# EAGLE board CT_schematic (EAGLE 7.6.0)

Size 100 x 80 mm. Coordinates in mm from the lower left corner, seen from the top.
Outline: 0,0 100,0 100,80 0,80 0,0
Copper layers (1*16): Top 0.035mm / dielectric 1.5mm / Bottom 0.035mm
Design rules "default": minimum track width 10mil, minimum drill 24mil, track to track 8mil, track to pad 8mil, pad to pad 8mil, via to via 8mil, smd to smd 8mil, copper to edge 40mil, drill to drill 8mil, minimum pad ring 10mil, minimum via ring 8mil, stop-mask expansion 4mil, vias tented up to drill 0mil, thermal gap 10mil

## Footprints (pad centres in the part's own frame; a part is rotated, then mirrored left to right if it is on the bottom)
C0603 = smd 0.8 x 0.8: 1 -0.762,0; 2 0.762,0
C0402 = smd 0.5 x 0.5: 1 -0.508,0; 2 0.508,0
C0805 = smd 1.2 x 1.3: 1 -1.016,0; 2 1.016,0
C1210 = smd 1.2 x 2.5: 1 -1.524,0; 2 1.524,0
EXV-9H = smd 3.505 x 1.676: 1 -2.857,0; 2 2.857,0
L0603 = smd 0.8 x 0.8: 1 -0.762,0; 2 0.762,0
DR1040 = smd 1.6 x 3.2: 1 -4.458,0; 2 4.458,0
L0806 = smd 1.016 x 1.524: 1 -0.889,0; 2 0.889,0
PJ-037B_PACKAGE = drill 3.7 square: 1 12,0 | drill 3.2 square: 2 6,0
R0603 = smd 0.8 x 0.8: 1 -0.762,0; 2 0.762,0
LQFP64 = smd 0.3 x 1.2: 1 -3.75,-5.75; 2 -3.25,-5.75; 3 -2.75,-5.75; 4 -2.25,-5.75; 5 -1.75,-5.75; 6 -1.25,-5.75; 7 -0.75,-5.75; 8 -0.25,-5.75; 9 0.25,-5.75; 10 0.75,-5.75; 11 1.25,-5.75; 12 1.75,-5.75; 13 2.25,-5.75; 14 2.75,-5.75; 15 3.25,-5.75; 16 3.75,-5.75; 33 3.75,5.75; 34 3.25,5.75; 35 2.75,5.75; 36 2.25,5.75; 37 1.75,5.75; 38 1.25,5.75; 39 0.75,5.75; 40 0.25,5.75; 41 -0.25,5.75; 42 -0.75,5.75; 43 -1.25,5.75; 44 -1.75,5.75; 45 -2.25,5.75; 46 -2.75,5.75; 47 -3.25,5.75; 48 -3.75,5.75 | smd 1.2 x 0.3: 17 5.75,-3.75; 18 5.75,-3.25; 19 5.75,-2.75; 20 5.75,-2.25; 21 5.75,-1.75; 22 5.75,-1.25; 23 5.75,-0.75; 24 5.75,-0.25; 25 5.75,0.25; 26 5.75,0.75; 27 5.75,1.25; 28 5.75,1.75; 29 5.75,2.25; 30 5.75,2.75; 31 5.75,3.25; 32 5.75,3.75; 49 -5.75,3.75; 50 -5.75,3.25; 51 -5.75,2.75; 52 -5.75,2.25; 53 -5.75,1.75; 54 -5.75,1.25; 55 -5.75,0.75; 56 -5.75,0.25; 57 -5.75,-0.25; 58 -5.75,-0.75; 59 -5.75,-1.25; 60 -5.75,-1.75; 61 -5.75,-2.25; 62 -5.75,-2.75; 63 -5.75,-3.25; 64 -5.75,-3.75
TDFN-8/6MM = smd 0.3 x 0.75: 1 0,0; 2 0.5,0; 3 1,0; 4 1.5,0; 5 1.5,3; 6 1,3; 7 0.5,3; 8 0,3
SMD-8 = smd 0.72 x 0.6: 1 -1.45,-0.7; 2 -0.485,-0.7; 3 0.485,-0.7; 4 1.455,-0.7; 5 1.455,0.7; 6 0.485,0.7; 7 -0.485,0.7; 8 -1.455,0.7
RHB32_3P45X3P45 = smd 0.85 x 0.28: 1 -2.475,1.75; 2 -2.475,1.25; 3 -2.475,0.75; 4 -2.475,0.25; 5 -2.475,-0.25; 6 -2.475,-0.75; 7 -2.475,-1.25; 8 -2.475,-1.75; 17 2.475,-1.75; 18 2.475,-1.25; 19 2.475,-0.75; 20 2.475,-0.25; 21 2.475,0.25; 22 2.475,0.75; 23 2.475,1.25; 24 2.475,1.75 | smd 0.28 x 0.85: 9 -1.75,-2.475; 10 -1.25,-2.475; 11 -0.75,-2.475; 12 -0.25,-2.475; 13 0.25,-2.475; 14 0.75,-2.475; 15 1.25,-2.475; 16 1.75,-2.475; 25 1.75,2.475; 26 1.25,2.475; 27 0.75,2.475; 28 0.25,2.475; 29 -0.25,2.475; 30 -0.75,2.475; 31 -1.25,2.475; 32 -1.75,2.475 | smd 3.45 x 3.45: 33 0,0
MICRO_USB_AB = smd 0.4 x 1.35: 1 1.3,0.26; 2 0.65,0.26; 3 0,0.26; 4 -0.65,0.26; 5 -1.3,0.26 | drill 0.6 pad 0.95 long: 6 4.175,-2.54; 7 -4.175,-2.54 | drill 0.7 pad 1.1 long: 8 -2.225,0.46; 9 2.225,0.46
SOT143B = smd 1 x 0.7: 1 -0.75,-1 | smd 0.6 x 0.7: 2 0.95,-1; 3 0.95,1; 4 -0.95,1
SOT-23-6 = smd 1.1 x 0.6: 1 -1.4,0.95; 2 -1.4,0; 3 -1.4,-0.95; 4 1.4,-0.95; 5 1.4,0; 6 1.4,0.95
XB24CZ7UIS-004 = smd 2.84 x 1.52: 1 -10,6; 2 -10,4; 3 -10,2; 4 -10,0; 5 -10,-2; 6 -10,-4; 7 -10,-6; 8 -10,-8; 9 -10,-10; 10 -10,-12; 11 -10,-14; 12 -10,-16; 13 -10,-18; 21 10,-18; 22 10,-16; 23 10,-14; 24 10,-12; 25 10,-10; 26 10,-8; 27 10,-6; 28 10,-4; 29 10,-2; 30 10,0; 31 10,2; 32 10,4; 33 10,6; 34 10,8; 35 10,10; 36 10,12; 37 10,14 | smd 1.52 x 2.84: 14 -6,-19.68; 15 -4,-19.68; 16 -2,-19.68; 17 0,-19.68; 18 2,-19.68; 19 4,-19.68; 20 6,-19.68
ABS07-32.768KHZ-7-T = smd 1.1 x 2.4: 1 -2.5,0; 2 0,0
ASFL1 = smd 1.7 x 1.5: 1 -1.27,-1.1; 2 1.27,-1.1; 3 1.27,1.1; 4 -1.27,1.1
TSOT-23-5 = smd 1.3 x 0.62: 1 -1.31,0.95; 2 -1.31,0; 3 -1.31,-0.95; 4 1.31,-0.95; 5 1.31,0.95
WSON-8 = smd 0.3 x 0.6: 1 -0.75,0; 2 0.05,0; 3 0.85,0; 4 1.65,0; 5 1.65,3.8; 6 0.85,3.8; 7 0.05,3.8; 8 -0.75,3.8 | smd 3 x 2.6: PAD 0.45,1.9
MSOP-8 = smd 1.499 x 0.432: 1 -2.184,0.965; 2 -2.184,0.33; 3 -2.184,-0.33; 4 -2.184,-0.965; 5 2.184,-0.965; 6 2.184,-0.33; 7 2.184,0.33; 8 2.184,0.965
SON-6 = smd 0.55 x 0.3: 1 -0.355,0.5 | smd 0.52 x 0.3: 2 -0.37,0; 3 -0.37,-0.5; 4 0.37,-0.5; 5 0.37,0; 6 0.37,0.5
DCU0008A_N = smd 0.5 x 0.3: 1 -1.6,0.75; 2 -1.6,0.25; 3 -1.6,-0.25; 4 -1.6,-0.75; 5 1.6,-0.75; 6 1.6,-0.25; 7 1.6,0.25; 8 1.6,0.75
RUT0012A = smd 0.7 x 0.2: 1 -0.7,0.8; 2 -0.7,0.4; 3 -0.7,0; 4 -0.7,-0.4; 5 -0.7,-0.8; 7 0.7,-0.8; 8 0.7,-0.4; 9 0.7,0; 10 0.7,0.4; 11 0.7,0.8 | smd 0.2 x 0.7: 6 0,-0.85; 12 0,0.85
SW_4-1437565-2 = smd 1.4 x 2.1: 1 -2.23,4.55; 2 -2.23,-4.55; 3 2.23,4.55; 4 2.23,-4.55
LGM67K-G1J2-24-Z = smd 0.8 x 1.4: A -2,0; C 0,0
NC7SZ125M5X = smd 1.3 x 0.7: 1 -1.3,0.95; 2 -1.3,0; 3 -1.3,-0.95; 4 1.3,-0.95; 5 1.3,0.95
DUMMY_PACKAGE_217 = drill 0.3: 1 0,-1; 2 1.5,-1; 3 3,-1

## Placement (x,y rotation side)
C1  1e-06  [C0603]  -55.88,82.55 0 top  (outside the outline)
C2  1e-07  [C0603]  -59.69,82.55 0 top  (outside the outline)
C3  1e-07  [C0603]  -63.5,82.55 0 top  (outside the outline)
C4  1e-07  [C0603]  -67.31,82.55 0 top  (outside the outline)
C5  1e-07  [C0603]  -71.12,82.55 0 top  (outside the outline)
C6  1e-07  [C0603]  -74.93,82.55 0 top  (outside the outline)
C7  4.7e-06  [C0603]  -29.21,82.55 0 top  (outside the outline)
C8  2.2e-06  [C0603]  -33.02,82.55 0 top  (outside the outline)
C9  2.2e-06  [C0603]  -36.83,82.55 0 top  (outside the outline)
C10  1e-08  [C0603]  -78.74,82.55 0 top  (outside the outline)
C11  1e-06  [C0603]  -82.55,82.55 0 top  (outside the outline)
C12  1e-11  [C0402]  -69.85,87.63 0 top  (outside the outline)
C13  1e-11  [C0402]  -73.66,87.63 0 top  (outside the outline)
C14  1e-08  [C0402]  -77.47,87.63 0 top  (outside the outline)
C15  1e-06  [C0603]  -15.24,87.63 0 top  (outside the outline)
C16  1e-06  [C0603]  -19.05,87.63 0 top  (outside the outline)
C17  1e-07  [C0402]  -81.28,87.63 0 top  (outside the outline)
C18  2.2e-06  [C0603]  -40.64,82.55 0 top  (outside the outline)
C19  1e-07  [C0402]  -15.24,92.71 0 top  (outside the outline)
C20  1e-07  [C0402]  -19.05,92.71 0 top  (outside the outline)
C21  2.2e-06  [C0603]  -44.45,82.55 0 top  (outside the outline)
C22  1e-06  [C0603]  -22.86,87.63 0 top  (outside the outline)
C23  1e-05  [C0805]  -40.64,71.12 0 top  (outside the outline)
C24  1e-07  [C0402]  -22.86,92.71 0 top  (outside the outline)
C25  4.7e-11  [C0402]  -66.04,87.63 0 top  (outside the outline)
C26  8.2e-12  [C0603]  -48.26,82.55 0 top  (outside the outline)
C27  1e-08  [C0402]  -26.67,92.71 0 top  (outside the outline)
C28  1e-08  [C0402]  -30.48,92.71 0 top  (outside the outline)
C29  1e-05  [C0805]  -45.72,71.12 0 top  (outside the outline)
C30  1e-05  [C0805]  -50.8,71.12 0 top  (outside the outline)
C31  1e-06  [C0603]  -26.67,87.63 0 top  (outside the outline)
C32  1e-05  [C1210]  -68.58,64.77 0 top  (outside the outline)
C33  1e-06  [C0603]  -30.48,87.63 0 top  (outside the outline)
C34  1e-05  [C0805]  -55.88,71.12 0 top  (outside the outline)
C35  1e-05  [C0805]  -60.96,71.12 0 top  (outside the outline)
C36  1.6e-09  [C0603]  -52.07,82.55 0 top  (outside the outline)
C37  1e-07  [C0402]  -34.29,92.71 0 top  (outside the outline)
C38  0.0001  [EXV-9H]  -72.39,55.88 0 top  (outside the outline)
C39  0.0001  [EXV-9H]  -17.78,64.77 0 top  (outside the outline)
C40  1e-08  [C0402]  -38.1,92.71 0 top  (outside the outline)
C41  1e-07  [C0402]  -41.91,92.71 0 top  (outside the outline)
C42  1e-08  [C0402]  -45.72,92.71 0 top  (outside the outline)
C43  1e-07  [C0402]  -49.53,92.71 0 top  (outside the outline)
C44  1e-08  [C0402]  -53.34,92.71 0 top  (outside the outline)
C45  1e-07  [C0402]  -57.15,92.71 0 top  (outside the outline)
C46  1e-08  [C0402]  -60.96,92.71 0 top  (outside the outline)
C47  1e-07  [C0402]  -64.77,92.71 0 top  (outside the outline)
C48  1e-08  [C0402]  -68.58,92.71 0 top  (outside the outline)
C49  1e-08  [C0402]  -72.39,92.71 0 top  (outside the outline)
C50  1e-08  [C0402]  -76.2,92.71 0 top  (outside the outline)
F1  240.0  [L0603]  -34.29,87.63 0 top  (outside the outline)
I1  7e-06  [DR1040]  -60.96,45.72 0 top  (outside the outline)
I2  3.3e-06  [L0806]  -74.93,64.77 0 top  (outside the outline)
J1  PJ-037B  [PJ-037B_PACKAGE]  -53.34,7.62 0 top  (outside the outline)
R2  1000.0  [R0603]  -38.1,87.63 0 top  (outside the outline)
R4  4700.0  [R0603]  -41.91,87.63 0 top  (outside the outline)
R5  4700.0  [R0603]  -45.72,87.63 0 top  (outside the outline)
R6  4700.0  [R0603]  -49.53,87.63 0 top  (outside the outline)
R9  2200.0  [R0603]  -53.34,87.63 0 top  (outside the outline)
R10  2200.0  [R0603]  -57.15,87.63 0 top  (outside the outline)
R11  10000.0  [R0603]  -45.72,77.47 0 top  (outside the outline)
R12  10000.0  [R0603]  -50.8,77.47 0 top  (outside the outline)
R13  22.0  [R0603]  -60.96,87.63 0 top  (outside the outline)
R14  47000.0  [R0603]  -55.88,77.47 0 top  (outside the outline)
R15  10000.0  [R0603]  -60.96,77.47 0 top  (outside the outline)
R16  10000.0  [R0603]  -66.04,77.47 0 top  (outside the outline)
R17  490000.0  [R0603]  -83.82,71.12 0 top  (outside the outline)
R18  1000000.0  [R0603]  -73.66,71.12 0 top  (outside the outline)
R19  100000.0  [R0603]  -15.24,77.47 0 top  (outside the outline)
R20  153694.38  [R0603]  -78.74,71.12 0 top  (outside the outline)
R21  100000.0  [R0603]  -20.32,77.47 0 top  (outside the outline)
R22  47000.0  [R0603]  -71.12,77.47 0 top  (outside the outline)
R23  56000.0  [R0603]  -76.2,77.47 0 top  (outside the outline)
R24  18000.0  [R0603]  -81.28,77.47 0 top  (outside the outline)
R25  10000.0  [R0603]  -15.24,82.55 0 top  (outside the outline)
R26  10000.0  [R0603]  -20.32,82.55 0 top  (outside the outline)
R27  82000.0  [R0603]  -25.4,82.55 0 top  (outside the outline)
R28  300000.0  [R0603]  -25.4,77.47 0 top  (outside the outline)
R29  120000.0  [R0603]  -30.48,77.47 0 top  (outside the outline)
R30  200000.0  [R0603]  -35.56,77.47 0 top  (outside the outline)
R31  200000.0  [R0603]  -40.64,77.47 0 top  (outside the outline)
U1  STM32F205RET7  [LQFP64]  -66.04,7.62 0 top  (outside the outline)
U2  24AA02T-I/MNY  [TDFN-8/6MM]  -77.47,43.18 0 top  (outside the outline)
U3  TMD27711  [SMD-8]  -35.56,71.12 0 top  (outside the outline)
U4  TUSB1210BRHBR  [RHB32_3P45X3P45]  -27.94,64.77 0 top  (outside the outline)
U5  47590-0001  [MICRO_USB_AB]  -80.01,7.62 0 top  (outside the outline)
U6  prtr5v0u2ax  [SOT143B]  -24.13,97.79 0 top  (outside the outline)
U7  MAX4995AAUT+T  [SOT-23-6]  -80.01,63.5 0 top  (outside the outline)
U8  XB24CZ7UIS-004  [XB24CZ7UIS-004]  -25.4,21.59 0 top  (outside the outline)
U9  ABS07-32.768KHZ-7-T  [ABS07-32.768KHZ-7-T]  -48.26,64.77 0 top  (outside the outline)
U10  ASFL1-19.2MHZ-NCS  [ASFL1]  -46.99,55.88 0 top  (outside the outline)
U11  ASFL1-25MHZ-NCS  [ASFL1]  -63.5,55.88 0 top  (outside the outline)
U12  ltc3406es5  [TSOT-23-5]  -66.04,71.12 0 top  (outside the outline)
U13  LP2951ACSDX/NOPB  [WSON-8]  -29.21,54.61 0 top  (outside the outline)
U14  TPS61085DGKR  [MSOP-8]  -50.8,44.45 0 top  (outside the outline)
U15  TPS3895ADRYR  [SON-6]  -64.77,96.52 0 top  (outside the outline)
U16  LSF0102DCTR  [DCU0008A_N]  -59.69,96.52 0 top  (outside the outline)
U17  LSF0204DRUTR  [RUT0012A]  -38.1,97.79 0 top  (outside the outline)
U18  4-1437565-2  [SW_4-1437565-2]  -27.94,45.72 0 top  (outside the outline)
U19  Q65110A2395  [LGM67K-G1J2-24-Z]  -57.15,64.77 0 top  (outside the outline)
U20  nc7sz125m5x  [NC7SZ125M5X]  -15.24,71.12 0 top  (outside the outline)
U21  nc7sz125m5x  [NC7SZ125M5X]  -21.59,71.12 0 top  (outside the outline)
U22  nc7sz125m5x  [NC7SZ125M5X]  -27.94,71.12 0 top  (outside the outline)
U23  Dummy  [DUMMY_PACKAGE_217]  -46.99,97.79 0 top  (outside the outline)

## Library data of the parts
C1-C50 F1 I1 I2 J1 R2 R4-R6 R9-R31 U1-U23 = circuit_tree

## Nets
CLK_CRYSTAL_U1_3: C12.1 U1.3 U9.1
CLK_CRYSTAL_U1_4: C13.1 U1.4 U9.2
CLK_U1_5: U1.5 U11.3
CLK_U4_1: U4.1 U10.3
GND: C1.2 C2.2 C3.2 C4.2 C5.2 C6.2 C7.2 C8.2 C9.2 C10.2 C11.2 C12.2 C13.2 C14.2 C15.2 C16.2 C17.2 C18.2 C19.2 C20.2 C21.2 C22.2 C23.2 C24.2 C25.2 C26.2 C27.2 C28.2 C29.2 C30.1 C30.2 C31.2 C32.2 C33.2 C34.2 C35.1 C35.2 C36.1 C36.2 C37.2 C38.2 C39.2 C40.2 C41.2 C42.2 C43.2 C44.2 C45.2 C46.2 C47.2 C48.2 C49.2 C50.2 J1.2 R2.2 R11.2 R14.2 R16.2 R17.2 R21.2 R24.2 R27.2 R29.2 U1.12 U1.18 U1.63 U2.4 U3.3 U4.33 U5.5 U5.6 U5.7 U5.8 U5.9 U6.1 U7.2 U8.1 U8.11 U8.13 U8.22 U8.35 U10.2 U11.2 U12.2 U13.3 U13.4 U13.PAD U14.4 U15.2 U16.1 U17.6 U19.C U20.1 U20.3 U21.1 U21.3 U22.1 U22.3 U23.1
NET_U1_7: R5.1 U1.7 U21.4
NET_U1_13: C10.1 C11.1 F1.1 U1.13
NET_U1_31: C8.1 U1.31
NET_U1_40: R10.1 U1.40 U2.5
NET_U1_41: R9.1 U1.41 U2.6
NET_U1_47: C9.1 U1.47
NET_U1_58: U16.4
NET_U1_59: U16.3
NET_U1_60: R11.1 U1.60
NET_U1_61: U19.A
NET_U1_62: U18.3 U18.4
NET_U3_4: C16.1 R13.1 U3.4
NET_U3_5: U3.5
NET_U3_6: U3.6
NET_U3_7: R12.1 U3.7
NET_U4_11: R15.1 U4.11
NET_U4_12: C21.1 U4.12
NET_U4_14: R16.1 U4.14
NET_U4_20: C18.1 U4.20
NET_U4_27: R6.1 U4.27 U22.4
NET_U5_1: C22.1 U4.22 U5.1 U6.4 U7.1
NET_U5_2: U4.19 U5.2 U6.3
NET_U5_3: U4.18 U5.3 U6.2
NET_U5_4: U4.23 U5.4
NET_U7_3: R14.1 U7.3
NET_U7_4: U4.17 U7.4
NET_U8_6: R4.1 U8.6 U20.4
NET_U12_1: U12.1
NET_U12_3: I1.1 U12.3
NET_U12_5: R17.1 R18.1 U12.5
NET_U12_ATNET_3: I1.2 R18.2
NET_U13_5: R19.1 U13.5
NET_U13_7: R20.2 R21.1 U13.7
NET_U14_1: R22.1 U14.1
NET_U14_2: R23.1 R24.1 U14.2
NET_U14_3: U14.3
NET_U14_5: I2.1 U14.5
NET_U14_7: U14.7
NET_U14_ATNET_3: R23.2
NET_U14_ATNET_4: R22.2
NET_U15_1: R26.1 R27.1 U15.1
NET_U15_3: R28.2 R29.1 U15.3
NET_U15_4: R25.1 U15.4 U20.2 U21.2 U22.2
NET_U16_8: R30.1 U16.8
NET_U17_12: R31.1 U17.12
NET_U18_1: R2.1 U18.1 U18.2
PROC_I2C1_SCL_TOXCVR: U3.2 U16.5
PROC_I2C1_SDA_TOXCVR: U3.8 U16.6
PROC_SPI1_MISO_TOIOBUF: U17.3
PROC_SPI1_MISO_TOXCVR: U8.17 U17.9
PROC_SPI1_MOSI_TOIOBUF: U17.2
PROC_SPI1_MOSI_TOXCVR: U8.16 U17.10
PROC_SPI1_NSS_TOIOBUF: U17.5
PROC_SPI1_NSS_TOXCVR: U8.15 U17.7
PROC_SPI1_SCK_TOIOBUF: U17.4
PROC_SPI1_SCK_TOXCVR: U8.14 U17.8
PROC_TIM1_CH2: U1.42 U23.2
PROC_TIM1_CH4: U1.44 U23.3
PROC_USB_OTG_HS_ULPI_CK: U1.21 U4.26
PROC_USB_OTG_HS_ULPI_D0: U1.17 U4.3
PROC_USB_OTG_HS_ULPI_D1: U1.26 U4.4
PROC_USB_OTG_HS_ULPI_D2: U1.27 U4.5
PROC_USB_OTG_HS_ULPI_D3: U1.29 U4.6
PROC_USB_OTG_HS_ULPI_D4: U1.30 U4.7
PROC_USB_OTG_HS_ULPI_D5: U1.33 U4.9
PROC_USB_OTG_HS_ULPI_D6: U1.34 U4.10
PROC_USB_OTG_HS_ULPI_D7: U1.57 U4.13
PROC_USB_OTG_HS_ULPI_DIR: U1.10 U4.31
PROC_USB_OTG_HS_ULPI_NXT: U1.11 U4.2
PROC_USB_OTG_HS_ULPI_STP: U1.8 U4.29
VCC_S1_5V2: C29.1 C31.1 C33.1 C34.1 C38.1 C39.1 I2.2 J1.1 U12.4 U13.8 U14.3 U14.6
VCC_TIER1_1V8: C1.1 C2.1 C3.1 C4.1 C5.1 C6.1 C7.1 C14.1 C19.1 C20.1 C30.2 C37.1 C42.1 C43.1 C46.1 C47.1 C48.1 C49.1 C50.1 F1.2 I1.2 R5.2 R6.2 R9.2 R10.2 R15.2 R18.2 R25.2 R26.2 R28.1 R31.2 U1.1 U1.19 U1.32 U1.48 U1.64 U2.7 U2.8 U4.28 U4.30 U4.32 U15.6 U16.2 U17.1 U20.5 U21.5 U22.5
VCC_TIER1_3V3: C15.1 C17.1 C23.1 C24.1 C25.1 C26.1 C27.1 C28.1 C32.1 C40.1 C41.1 C44.1 C45.1 R4.2 R12.2 R13.2 R19.2 R20.1 R30.2 U3.1 U4.21 U8.2 U8.27 U10.4 U11.4 U13.1 U16.7 U17.11
VCC_TIER1_5V0: C35.2 R23.2 U7.5

## Tracks (layer width: path | path; a pad name or v marks a point on that pad's centre or on a via)
CLK_CRYSTAL_U1_3  (2 unrouted)
CLK_CRYSTAL_U1_4  (2 unrouted)
CLK_U1_5  (1 unrouted)
CLK_U4_1  (1 unrouted)
GND  (98 unrouted)
NET_U1_7  (2 unrouted)
NET_U1_13  (3 unrouted)
NET_U1_31  (1 unrouted)
NET_U1_40  (2 unrouted)
NET_U1_41  (2 unrouted)
NET_U1_47  (1 unrouted)
NET_U1_60  (1 unrouted)
NET_U1_62  (1 unrouted)
NET_U3_4  (2 unrouted)
NET_U3_7  (1 unrouted)
NET_U4_11  (1 unrouted)
NET_U4_12  (1 unrouted)
NET_U4_14  (1 unrouted)
NET_U4_20  (1 unrouted)
NET_U4_27  (2 unrouted)
NET_U5_1  (4 unrouted)
NET_U5_2  (2 unrouted)
NET_U5_3  (2 unrouted)
NET_U5_4  (1 unrouted)
NET_U7_3  (1 unrouted)
NET_U7_4  (1 unrouted)
NET_U8_6  (2 unrouted)
NET_U12_3  (1 unrouted)
NET_U12_5  (2 unrouted)
NET_U12_ATNET_3  (1 unrouted)
NET_U13_5  (1 unrouted)
NET_U13_7  (2 unrouted)
NET_U14_1  (1 unrouted)
NET_U14_2  (2 unrouted)
NET_U14_5  (1 unrouted)
NET_U15_1  (2 unrouted)
NET_U15_3  (2 unrouted)
NET_U15_4  (4 unrouted)
NET_U16_8  (1 unrouted)
NET_U17_12  (1 unrouted)
NET_U18_1  (2 unrouted)
PROC_I2C1_SCL_TOXCVR  (1 unrouted)
PROC_I2C1_SDA_TOXCVR  (1 unrouted)
PROC_SPI1_MISO_TOXCVR  (1 unrouted)
PROC_SPI1_MOSI_TOXCVR  (1 unrouted)
PROC_SPI1_NSS_TOXCVR  (1 unrouted)
PROC_SPI1_SCK_TOXCVR  (1 unrouted)
PROC_TIM1_CH2  (1 unrouted)
PROC_TIM1_CH4  (1 unrouted)
PROC_USB_OTG_HS_ULPI_CK  (1 unrouted)
PROC_USB_OTG_HS_ULPI_D0  (1 unrouted)
PROC_USB_OTG_HS_ULPI_D1  (1 unrouted)
PROC_USB_OTG_HS_ULPI_D2  (1 unrouted)
PROC_USB_OTG_HS_ULPI_D3  (1 unrouted)
PROC_USB_OTG_HS_ULPI_D4  (1 unrouted)
PROC_USB_OTG_HS_ULPI_D5  (1 unrouted)
PROC_USB_OTG_HS_ULPI_D6  (1 unrouted)
PROC_USB_OTG_HS_ULPI_D7  (1 unrouted)
PROC_USB_OTG_HS_ULPI_DIR  (1 unrouted)
PROC_USB_OTG_HS_ULPI_NXT  (1 unrouted)
PROC_USB_OTG_HS_ULPI_STP  (1 unrouted)
VCC_S1_5V2  (11 unrouted)
VCC_TIER1_1V8  (46 unrouted)
VCC_TIER1_3V3  (27 unrouted)
VCC_TIER1_5V0  (2 unrouted)